# Altium PCB SurfacePressureSensor_V1.PcbDoc
Units mil, origin at the board's own origin, x right, y up, seen from the top; angles counter-clockwise.
Board outline 455 x 795 mil, 2 copper layers (Top Layer, Bottom Layer); 5 components, 6 nets, 24 pads, 7 vias.
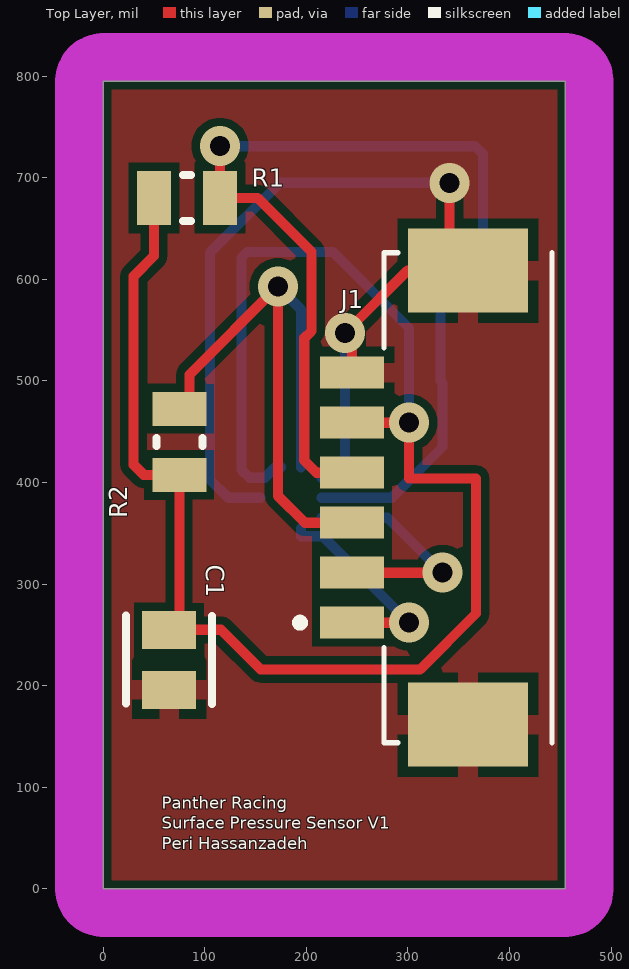
[diagram p0: Top Layer view]
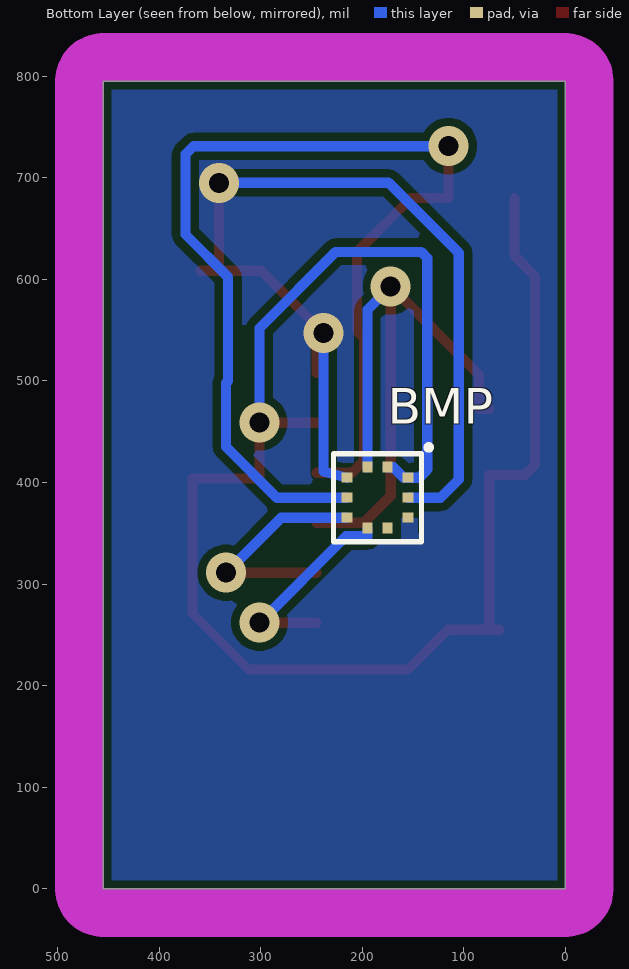
[diagram p1: Bottom Layer view, seen from below]

## Layer stack, top to bottom
Top Solder: solder mask 0.4, Solder Resist, Dk 3.5
Top Layer: signal copper 1.4
Dielectric 1: dielectric 12.6, FR-4, Dk 4.8
Bottom Layer: signal copper 1.4
Bottom Solder: solder mask 0.4, Solder Resist, Dk 3.5

## Board outline
0,0 455,0 455,795 0,795

## Design rules (kind name [scope] priority, off if disabled: settings)
BoardOutlineClearance [All] p1: gap=7.87 ignorepadtopadclearanceinfootprint=FALSE except(15.75: Arc-SplitBarrior Arc-SplitContinuation Track-SplitBarrior Track-SplitContinuation SMDPad-SplitBarrior SMDPad-SplitContinuation THPad-SplitBarrior THPad-SplitContinuation Via-SplitBarrior Via-SplitContinuation Fill-SplitBarrior Fill-SplitContinuation Poly-SplitBarrior Poly-SplitContinuation Region-SplitBarrior Region-SplitContinuation Text-SplitBarrior Text-SplitContinuation)
Clearance "Clearance Bottom Layer" [OnLayer('Bottom Layer')] p1: gap=8 ignorepadtopadclearanceinfootprint=TRUE except(10: Arc-Text Track-Text SMDPad-Text THPad-Text Via-Text Fill-Text Poly-Text Region-Text Text-Text)
Clearance "Clearance Top Layer" [OnLayer('Top Layer')] p2: gap=8 ignorepadtopadclearanceinfootprint=TRUE except(10: Arc-Text Track-Text SMDPad-Text THPad-Text Via-Text Fill-Text Poly-Text Region-Text Text-Text)
Clearance [All] p3: gap=7.87 ignorepadtopadclearanceinfootprint=FALSE except(3.5: Arc-Arc Arc-Track Arc-SMDPad Track-Track Track-SMDPad SMDPad-SMDPad; 5: Arc-Via Track-Via SMDPad-Via THPad-Via Via-Via; 10: Arc-Text Track-Text SMDPad-Text THPad-Text Via-Text Fill-Text Poly-Text Region-Text Text-Text)
HoleSize [All] p1: absolutevalues=TRUE maxlimit=248.03 minlimit=7.87 maxpercent=80.000 minpercent=20.000
MinimumAnnularRing [All] p1: minimumring=3
MinimumSolderMaskSliver [All] p1: minsoldermaskwidth=3.94
PolygonConnect PolygonConnect_1 [All] p1: thpad.connectstyle=Relief thpad.reliefconductorwidth=20 thpad.reliefentries=4 thpad.polygonreliefangle="90 Angle" thpad.airgapwidth=10 smdpad.connectstyle=Relief smdpad.reliefconductorwidth=20 smdpad.reliefentries=4 smdpad.polygonreliefangle="90 Angle" smdpad.airgapwidth=10 via.connectstyle=Direct via.reliefconductorwidth=20 via.reliefentries=4 via.polygonreliefangle="90 Angle" via.airgapwidth=10
RoutingCorners [All] p1: cornerstyle=Round minsetback=100 maxsetback=100
RoutingVias [All] p1: holewidth=19.68 width=39.37 viastyle="Through Hole" minholewidth=7.87 minwidth=17.72 maxholewidth=39.37 maxwidth=78.74
SilkToSilkClearance [All] p1: silktosilkclearance=3.94
SilkToSolderMaskClearance [IsPad] p1: minsilkscreentomaskgap=3.94 clearancetoexposedcopper=TRUE
SolderMaskExpansion [All] p1: expansion=4 istentingtop=FALSE
Width [All] p1: maxlimit=100 minlimit=3.5 preferedwidth=10 minimp=50.000000 maximp=50.000000 favimp=50.000000
25 further rules are at their usual default settings.

## Components (designator, comment, footprint, x,y, rotation, side; value= is the part's Value field where it differs from the comment)
BMP "BMP581" BMP581 185.02,385 r180 bottom
C1 "0.1uF" FP-C0805C-DG-MFG 65,225.47 r270 top value=10uF
J1 "0532610671" MOLEX_0532610671 245,385 r90 top
R1 "2.2k" RESC2013X50X30LL20T20 82.52,680 r180 top
R2 "2.2k" RESC2013X50X30LL20T20 75,440 r90 top

## Footprints (in the part's own frame and the unit in brackets; to place one, negate y for a bottom-side part, rotate by r counter-clockwise, add the part's x,y. Pads: shape width x height; smd on the part's side, far side on the other; paste and mask are expansions set on the pad)
BMP581 [mm]
  rect 0.25x0.275 smd mask+0.064: 1(0.25,0.763) 2(-0.25,0.763) 6(-0.25,-0.763) 7(0.25,-0.763)
  rect 0.275x0.25 smd mask+0.064: 3(-0.763,0.5) 4(-0.763,0) 5(-0.763,-0.5) 8(0.762,-0.5) 9(0.762,0) 10(0.762,0.5)
  silkscreen extent -1.1,-1.1 1.33,1.3
FP-C0805C-DG-MFG [mm]
  rect 0.95x1.35 smd paste+0 mask+0: 1(-0.75,0) 2(0.75,0)
  silkscreen extent -1.11,-1.08 1.1,1.07, body extent -1.4,-0.85 1.4,0.85, height 0.25
MOLEX_0532610671 [mm]
  rect 0.8x1.6 smd: 1(-3.125,0) 2(-1.875,0) 3(-0.625,0) 4(0.625,0) 5(1.875,0) 6(3.125,0)
  rect 2.1x3 smd: S1(-5.675,-2.9) S2(5.675,-2.9)
  silkscreen extent -6.13,-5 6.12,1.4
RESC2013X50X30LL20T20 [mm] "Chip Resistor, 2-Leads, Body 2.00x1.25mm, IPC High Density"
  rect 0.85x1.35 smd: 1(-0.825,0) 2(0.825,0)
  silkscreen extent -0.1,-0.58 0.1,0.58, body extent -1.1,-0.72 1.1,0.72, height 0.5

## Part data
BMP: "Very small, low-power and low noise 24-bit absolute barometric pressure sensor. This digital, high-performance sensor is ideally suited for a wide range of altitude tracking applications and offers outstanding design flexibility", Package=None, Availability="In Stock", Check_prices=https://www.snapeda.com/parts/BMP581/Bosch/view-part/?ref=eda, MF=Bosch, MP=BMP581, Price=None, Purchase-URL=https://pricing.snapeda.com/search/part/BMP581/?ref=eda, SnapEDA_Link=https://www.snapeda.com/parts/BMP581/Bosch/view-part/?ref=snap
C1: library part CMP-2007-03243-2, "CAP CER 10UF 10V X5R 0805", 3DS Part Number=220-00001, Capacitance=10uF, Manufacturer=Kemet, Manufacturer Part Number=C0805C106K8PACTU, Package=C0805C-DG, Temperature="-55°C to +85°C", Temperature Characteristic=X5R, Temperature Coefficient=15%, Temperature Range High=+85°C, Temperature Range Low=-55°C, Tolerance=10%, Voltage=10V, Automotive=No, Category=Cap, ComponentLink2Description=Datasheet, ComponentLink2URL=https://content.kemet.com/datasheets/KEM_C1006_X5R_SMD.pdf, Device Class L1="Passive Components", Device Class L2=Capacitors, Device Class L3="Ceramic Capacitors", Digikey Description="CAP CER 10UF 10V X5R 0805", Height=1.4mm, Ipc Land Pattern Name=CAPC200125X125, Lead Free=Yes, Material=Ceramic, Mouser Description="CAP CER 10UF 10V X5R 0805", Octopart=https://octopart.com/c0805c106k8pactu-kemet-98697, RoHS=TRUE, Voltage Rating=10V
J1: "Picoblade Connector, 6 Circuit Single Row, Right Angle Surface Mount SMT PCB", Package=None, Digi-Key_Part_Number=WM7624CT-ND, Digi-Key_Purchase_URL=https://www.digikey.com/product-detail/en/molex/0532610671/WM7624CT-ND/699111?utm_source=snapeda&utm_medium=aggregator&utm_campaign=symbol, MF=Molex, MP=0532610671, SnapEDA_Link=https://www.snapeda.com/parts/0532610671/Molex/view-part/523089/?ref=snap
R1 R2: library part CMP-2001-04896-1, Manufacturer="Vishay Dale", Part Number=CRCW08050000Z0EA

## Via types
v1: diameter 39.37, hole 19.68, Top Layer to Bottom Layer, 7 vias

## Nets (pads, with @x,y where several pads share a name; then routed paths per layer and width w, separated by ;. In a path a pad name is that pad's centre, name@x,y a point inside that pad or via, vN(x,y) a via of type N, cw(c..) or ccw(c..) an arc to the next point about the centre after c; other vN are vias at no path point)
CSB: BMP.6 J1.1 | length 205.3
  Top Layer w10: J1.1 v1(301,262)
  Bottom Layer w10: BMP.6 194.86,347 216,347 v1(301,262)
GND: BMP.3 BMP.8 BMP.9 C1.2 J1.6 J1.S1 J1.S2 | length 984.2
  Top Layer w10: v1(238,547) v1@245,554 ; J1.6 v1@245,554 ; v1(341,695) J1.S2@341,608.42 ; J1.S2 J1.S2@341,608.42 ; v1@245,554 299.42,608.42 J1.S2@341,608.42
  Bottom Layer w10: BMP.9 123,385 105,403 105,626 174,695 v1(341,695) ; BMP.3 238,410.68 v1(238,547)
MISO: BMP.5 J1.2 | length 230.4
  Top Layer w10: J1.2 v1(334,311.18)
  Bottom Layer w10: BMP.5 279.87,365.31 v1(334,311.18)
MOSI: BMP.4 J1.4 R1.1 | length 1131.4
  Top Layer w10: v1(115,731) R1.1 152,680 205,627 205,549 198,542 198,421.61 210,409.61 J1.4
  Bottom Layer w10: v1(115,731) 366,731 374,723 374,644 332,602 332,500 334,498 334,435 284,385 BMP.4
SCK: BMP.2 J1.3 R2.2 | length 644
  Top Layer w10: R2.2 85,472.48 85,506 v1(172,593) 172,387 198.61,360.39 J1.3
  Bottom Layer w10: v1(172,593) 194.86,570.14 BMP.2
VCC: BMP.1 BMP.10 C1.1 J1.5 R1.2 R2.1 | length 1725.9
  Top Layer w10: R1.2 50.04,623.04 30,603 30,417.52 40,407.52 R2.1 C1.1@75,255 ; C1.1 C1.1@75,255 ; v1(301,459) v1@300.91,458.91 ; C1.1@75,255 116,255 155,216 312,216 367,271 367,403.82 301,403.82 301,458.82 v1@300.91,458.91 ; v1@300.91,458.91 300.82,458.82 J1.5 v1@300.91,458.91
  Bottom Layer w10: BMP.1 169.34,415.02 159,404.68 BMP.10 144,404.68 136,412.68 136,621 142,627 226,627 301,552 v1(301,459)
pads on no net: BMP.7

## Polygon pours and split planes (outlines as drawn)
GND on Top Layer "GND_L01_P003" (solid, pour order 3): 0,0 455,0 455,795 0,795
GND on Bottom Layer "GND_L02_P002" (solid, pour order 2): 0,0 455,0 455,795 0,795

## Keep-outs
Keep-Out Layer:
  lines w47.24: -23.62,0 ccw(c0,0) 0,-23.62 ; -23.62,0 ccw(c0,0) 0,-23.62 ; -23.62,0 -23.62,795 ; -23.62,795 cw(c0,795) 0,818.62 ; -23.62,795 cw(c0,795) 0,818.62 ; 0,-23.62 455,-23.62 ; 0,818.62 455,818.62 ; 455,-23.62 ccw(c455,0) 478.62,0 ; 455,-23.62 ccw(c455,0) 478.62,0 ; 455,818.62 cw(c455,795) 478.62,795 ; 455,818.62 cw(c455,795) 478.62,795 ; 478.62,0 478.62,795

## Silkscreen, mask and mechanical layers (free items; w line width, h text height)
Top Overlay:
  text "Panther Racing / Surface Pressure Sensor V1 / Peri Hassanzadeh" at 57.5,35 h20